# EAGLE board CPC_RAM512K_V1.01 (EAGLE 6.4)
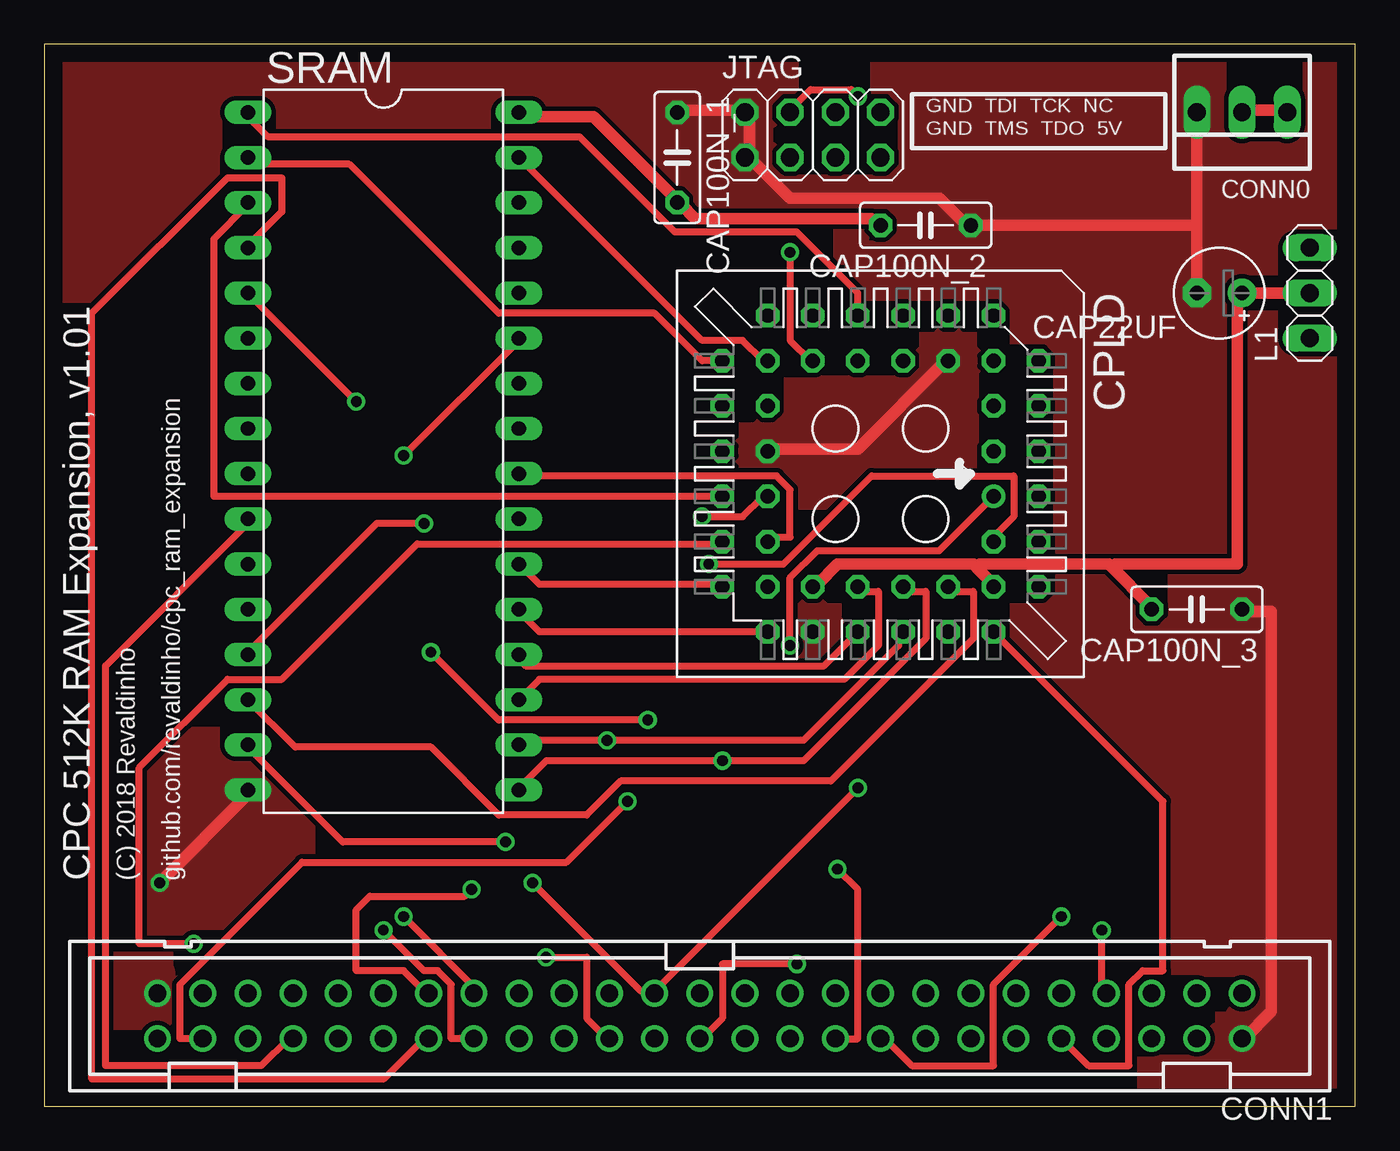
[diagram p0: board, top side]
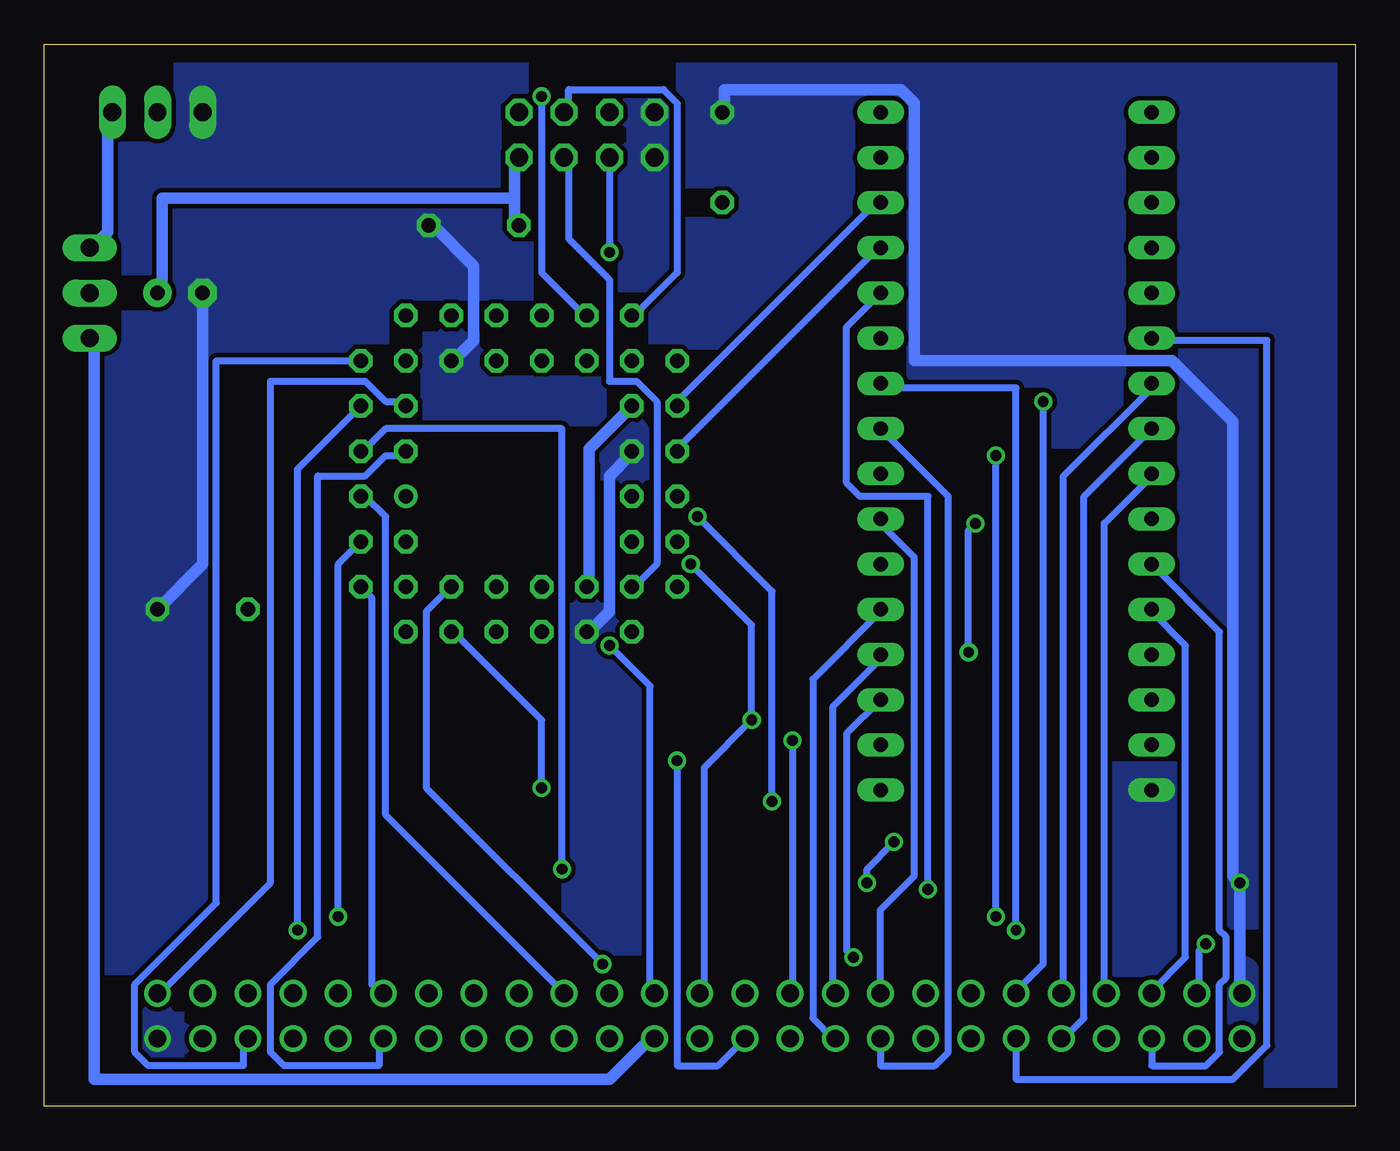
[diagram p1: board, bottom side, seen from below]

Size 73.66 x 59.69 mm. Coordinates in mm from the lower left corner, seen from the top.
Outline: 0,0 73.66,0 73.66,59.69 0,59.69 0,0
Copper layers (1*16): Top 0.035mm / dielectric 1.5mm / Bottom 0.035mm
Design rules "default": minimum track width 10mil, minimum drill 24mil, track to track 8mil, track to pad 8mil, pad to pad 8mil, via to via 8mil, smd to smd 8mil, copper to edge 40mil, drill to drill 8mil, minimum pad ring 10mil, minimum via ring 8mil, stop-mask expansion 4mil, vias tented up to drill 0mil, thermal gap 10mil
Net classes: 0 signal: width 0.381 mm, clearance 0.254 mm; 1 supply: width 0.635 mm, clearance 0.254 mm

## Footprints (pad centres in the part's own frame; a part is rotated, then mirrored left to right if it is on the bottom)
E2,5-5 = drill 0.813 pad 1.6: + -1.27,0 | drill 0.813 pad 1.6 octagon: - 1.27,0
C050-025X075 = drill 0.813 octagon: 1 -2.54,0; 2 2.54,0
22-23-2031 = drill 1 long: 1 -2.54,0; 2 0,0; 3 2.54,0
PAK100/2500-50 = drill 1 pad 1.422: 1 -30.48,-1.27; 2 -30.48,1.27; 3 -27.94,-1.27; 4 -27.94,1.27; 5 -25.4,-1.27; 6 -25.4,1.27; 7 -22.86,-1.27; 8 -22.86,1.27; 9 -20.32,-1.27; 10 -20.32,1.27; 11 -17.78,-1.27; 12 -17.78,1.27; 13 -15.24,-1.27; 14 -15.24,1.27; 15 -12.7,-1.27; 16 -12.7,1.27; 17 -10.16,-1.27; 18 -10.16,1.27; 19 -7.62,-1.27; 20 -7.62,1.27; 21 -5.08,-1.27; 22 -5.08,1.27; 23 -2.54,-1.27; 24 -2.54,1.27; 25 0,-1.27; 26 0,1.27; 27 2.54,-1.27; 28 2.54,1.27; 29 5.08,-1.27; 30 5.08,1.27; 31 7.62,-1.27; 32 7.62,1.27; 33 10.16,-1.27; 34 10.16,1.27; 35 12.7,-1.27; 36 12.7,1.27; 37 15.24,-1.27; 38 15.24,1.27; 39 17.78,-1.27; 40 17.78,1.27; 41 20.32,-1.27; 42 20.32,1.27; 43 22.86,-1.27; 44 22.86,1.27; 45 25.4,-1.27; 46 25.4,1.27; 47 27.94,-1.27; 48 27.94,1.27; 49 30.48,-1.27; 50 30.48,1.27
PLCC-S44-SOCKET = drill 0.813: 1 1.27,6.35 | drill 0.813 octagon: 2 -1.27,8.89; 3 -1.27,6.35; 4 -3.81,8.89; 5 -3.81,6.35; 6 -6.35,8.89; 7 -8.89,6.35; 8 -6.35,6.35; 9 -8.89,3.81; 10 -6.35,3.81; 11 -8.89,1.27; 12 -6.35,1.27; 13 -8.89,-1.27; 14 -6.35,-1.27; 15 -8.89,-3.81; 16 -6.35,-3.81; 17 -8.89,-6.35; 18 -6.35,-8.89; 19 -6.35,-6.35; 20 -3.81,-8.89; 21 -3.81,-6.35; 22 -1.27,-8.89; 23 -1.27,-6.35; 24 1.27,-8.89; 25 1.27,-6.35; 26 3.81,-8.89; 27 3.81,-6.35; 28 6.35,-8.89; 29 8.89,-6.35; 30 6.35,-6.35; 31 8.89,-3.81; 32 6.35,-3.81; 33 8.89,-1.27; 34 6.35,-1.27; 35 8.89,1.27; 36 6.35,1.27; 37 8.89,3.81; 38 6.35,3.81; 39 8.89,6.35; 40 6.35,8.89; 41 6.35,6.35; 42 3.81,8.89; 43 3.81,6.35; 44 1.27,8.89
2X04 = drill 1.016 octagon: 1 -3.81,-1.27; 2 -3.81,1.27; 3 -1.27,-1.27; 4 -1.27,1.27; 5 1.27,-1.27; 6 1.27,1.27; 7 3.81,-1.27; 8 3.81,1.27
1X03 = drill 1.016 long: 1 -2.54,0; 2 0,0; 3 2.54,0
DIL32 = drill 0.813 long: 1 -19.05,-7.62; 2 -16.51,-7.62; 3 -13.97,-7.62; 4 -11.43,-7.62; 5 -8.89,-7.62; 6 -6.35,-7.62; 7 -3.81,-7.62; 8 -1.27,-7.62; 9 1.27,-7.62; 10 3.81,-7.62; 11 6.35,-7.62; 12 8.89,-7.62; 13 11.43,-7.62; 14 13.97,-7.62; 15 16.51,-7.62; 16 19.05,-7.62; 17 19.05,7.62; 18 16.51,7.62; 19 13.97,7.62; 20 11.43,7.62; 21 8.89,7.62; 22 6.35,7.62; 23 3.81,7.62; 24 1.27,7.62; 25 -1.27,7.62; 26 -3.81,7.62; 27 -6.35,7.62; 28 -8.89,7.62; 29 -11.43,7.62; 30 -13.97,7.62; 31 -16.51,7.62; 32 -19.05,7.62

## Placement (x,y rotation side)
CAP22UF  [E2,5-5]  66.04,45.72 180 top
CAP100N_1  [C050-025X075]  35.56,53.34 270 top
CAP100N_2  [C050-025X075]  49.53,49.53 180 top
CAP100N_3  [C050-025X075]  64.77,27.94 180 top
CONN0  [22-23-2031]  67.31,55.88 180 top
CONN1  [PAK100/2500-50]  36.83,5.08 180 top
CPLD  [PLCC-S44-SOCKET]  46.99,35.56 270 top
JTAG  [2X04]  43.18,54.61 0 top
L1  [1X03]  71.12,45.72 90 top
SRAM  [DIL32]  19.05,36.83 270 top

## Library data of the parts
CAP22UF CAP100N_1-CAP100N_3 = resistor
CONN0 = con-molex
CONN1 = con-3m
CPLD SRAM = ic-package
JTAG L1 = pinhead

## Nets
A0: CONN1.33 SRAM.23
A1: CONN1.34 SRAM.25
A2: CONN1.35 SRAM.27
A3: CONN1.36 SRAM.26
A4: CONN1.37 SRAM.28
A5: CONN1.38 SRAM.4
A6: CONN1.39 SRAM.5
A7: CONN1.40 SRAM.6
A8: CONN1.41 SRAM.7
A9: CONN1.42 SRAM.8
A10: CONN1.43 SRAM.9
A11: CONN1.44 SRAM.10
A12: CONN1.45 SRAM.12
A13: CONN1.46 SRAM.11
A14: CONN1.47 CPLD.26
A15: CONN1.48 CPLD.25
BUSACK_B: CONN1.13
BUSRESET_B: CONN1.11 CPLD.40
BUSRQ_B: CONN1.14
CLK: CONN1.1 CPLD.5
CURSOR: CONN1.5
D0: CONN1.25 CPLD.43 SRAM.13
D1: CONN1.26 CPLD.38 SRAM.14
D2: CONN1.27 CPLD.37 SRAM.15
D3: CONN1.28 CPLD.36 SRAM.17
D4: CONN1.29 CPLD.35 SRAM.18
D5: CONN1.30 CPLD.34 SRAM.19
D6: CONN1.31 CPLD.33 SRAM.20
D7: CONN1.32 CPLD.29 SRAM.21
EXP_B: CONN1.3
HALT_B: CONN1.17
HIADR0: CPLD.24 SRAM.3
HIADR1: CPLD.19 SRAM.31
HIADR2: CPLD.18 SRAM.2
HIADR3: CPLD.20 SRAM.30
HIADR4: CPLD.13 SRAM.1
INT_B: CONN1.16
IOREQ_B: CONN1.20 CPLD.2
LPEN: CONN1.4
M1_B: CONN1.22
MREQ_B: CONN1.23 CPLD.1
NMI_B: CONN1.15
RAMCS_B: CPLD.28 SRAM.22
RAMDIS: CONN1.6 CPLD.6
RAMOE_B: CPLD.27 SRAM.24
RAMRD_B: CONN1.7 CPLD.4
RAMWE_B: CPLD.22 SRAM.29
RD_B: CONN1.19 CPLD.44
READY: CONN1.12 CPLD.3
RESET_B: CONN1.10 CPLD.39
RFSH_B: CONN1.21
ROMDIS: CONN1.8
ROMEN_B: CONN1.9
SOUND: CONN1.50
TCK: CPLD.17 JTAG.6
TDI: CPLD.15 JTAG.4
TDO: CPLD.30 JTAG.5
TMS: CPLD.16 JTAG.3
VDD [supply]: CAP22UF.+ CAP100N_1.2 CAP100N_2.2 CAP100N_3.2 CPLD.21 CPLD.32 CPLD.41 JTAG.7 L1.2 SRAM.32
VDD_CPC [supply]: CONN1.24 L1.1
VDD_EXT [supply]: CONN0.1 CONN0.2 L1.3
VSS [supply]: CAP22UF.- CAP100N_1.1 CAP100N_2.1 CAP100N_3.1 CONN0.3 CONN1.2 CONN1.49 CPLD.10 CPLD.23 CPLD.31 JTAG.1 JTAG.2 SRAM.16
WR_B: CONN1.18 CPLD.42

## Tracks (layer width: path | path; a pad name or v marks a point on that pad's centre or on a via)
A0
  Bottom 0.381: CONN1.33 26.67,11.05 24.77,12.95 24.77,30.86 26.67,32.77 SRAM.23
A1
  Bottom 0.381: SRAM.25 22.86,34.29 22.86,3.05 23.62,2.29 26.67,2.29 CONN1.34
A2  (via drill 0.61)
  Top 0.381: v20.19,36.58 26.67,43.05 SRAM.27 | v20.19,10.67 24.38,6.48 CONN1.35
  Bottom 0.381: v20.19,10.67 v20.19,36.58
A3  (via drill 0.61)
  Top 0.381: v19.05,9.91 21.34,7.62 22.1,7.62 22.86,6.86 22.86,3.81 CONN1.36
  Bottom 0.381: v19.05,9.91 19.05,40.39 26.67,40.39 SRAM.26
A4  (via drill 0.61)
  Top 0.381: v24,12.19 23.62,11.81 18.29,11.81 17.53,11.05 17.53,7.62 20.19,7.62 21.34,6.48 CONN1.37
  Bottom 0.381: SRAM.28 28.57,43.81 28.57,35.05 27.81,34.29 24,34.29 v24,12.19
A5
  Top 0.381: SRAM.4 11.43,48.39 13.34,50.29 13.34,52.2 10.29,52.2 2.67,44.58 2.67,1.52 19.05,1.52 21.34,3.81 CONN1.38
A6  (via drill 0.61)
  Top 0.381: v17.53,39.62 SRAM.5
  Bottom 0.381: v17.53,39.62 17.53,8 19.05,6.48 CONN1.39
A7
  Bottom 0.381: CONN1.40 19.05,1.52 6.86,1.52 4.95,3.43 4.95,43.05 11.43,43.05 SRAM.6
A8
  Bottom 0.381: SRAM.7 11.43,40.39 16.38,35.43 16.38,6.48 CONN1.41
A9
  Bottom 0.381: SRAM.8 15.24,34.29 15.24,4.95 16.38,3.81 CONN1.42
A10
  Bottom 0.381: SRAM.9 11.43,35.43 14.1,32.77 14.1,6.48 CONN1.43
A11
  Top 0.381: SRAM.10 11.43,32.77 3.43,24.77 3.43,2.29 12.19,2.29 13.72,3.81 CONN1.44
A12
  Bottom 0.381: SRAM.12 11.43,27.81 9.53,25.91 9.53,8.38 11.43,6.48 CONN1.45
A13
  Bottom 0.381: SRAM.11 7.62,26.67 7.62,9.91 7.24,9.53 7.24,7.24 7.62,6.86 7.62,3.05 8.38,2.29 11.43,2.29 CONN1.46
A14  (via drill 0.61)
  Top 0.381: v8.38,9.14 5.33,9.14 5.33,19.05 10.29,24 13.34,24 20.95,31.62 38.1,31.62 CPLD.26
  Bottom 0.381: v8.38,9.14 8.76,8.76 8.76,6.48 CONN1.47
A15  (via drill 0.61)
  Top 0.381: v36.96,33.15 39.24,33.15 40.39,34.29 CPLD.25 | v32.77,17.14 29.34,13.72 14.48,13.72 7.62,6.86 7.62,3.81 CONN1.48
  Bottom 0.381: v36.96,33.15 32.77,28.96 v32.77,17.14
BUSRESET_B
  Bottom 0.381: CPLD.40 55.24,28.57 55.24,6.86 54.86,6.48 CONN1.11
CLK
  Bottom 0.381: CPLD.5 53.34,39.62 54.48,39.62 55.63,40.77 60.96,40.77 60.96,12.57 67.06,6.48 CONN1.1
D0  (via drill 0.61)
  Top 0.381: v21.34,32.77 18.67,32.77 11.43,25.53 SRAM.13 | v21.72,25.53 25.53,21.72 v33.91,21.72 | v37.34,30.48 41.53,30.48 46.48,35.43 54.48,35.43 54.48,33.15 53.34,32 CPLD.43
  Bottom 0.381: v21.34,32.77 21.72,32.38 v21.72,25.53 | CONN1.25 36.58,6.48 36.58,19.05 v33.91,21.72 33.91,27.05 v37.34,30.48
D1  (via drill 0.61)
  Top 0.381: SRAM.14 14.1,20.19 21.72,20.19 25.53,16.38 30.48,16.38 32.38,18.29 44.2,18.29 52.2,26.29 52.2,28.96 51.05,28.96 CPLD.38 | v42.29,8 38.1,8 38.1,4.95 36.96,3.81 CONN1.26
  Bottom 0.381: v42.29,8 52.2,17.91 52.2,27.81 CPLD.38
D2  (via drill 0.61)
  Top 0.381: v25.91,14.86 16.76,14.86 11.43,20.19 SRAM.15 | v27.43,12.57 33.53,6.48 34.29,6.48 | 34.29,6.48 v45.72,17.91 | 34.29,6.48 CONN1.27
  Bottom 0.381: v25.91,14.86 27.43,13.34 v27.43,12.57 | v45.72,17.91 45.72,21.72 50.67,26.67 CPLD.37
D3  (via drill 0.61)
  Top 0.381: SRAM.17 26.67,17.91 28.19,19.43 v38.1,19.43 42.67,19.43 49.53,26.29 49.53,28.96 48.39,28.96 CPLD.36
  Bottom 0.381: CONN1.28 35.81,2.29 38.1,2.29 v38.1,19.43
D4  (via drill 0.61)
  Top 0.381: SRAM.18 26.67,20.57 v31.62,20.57 42.67,20.57 48.01,25.91 48.01,26.67 CPLD.35
  Bottom 0.381: v31.62,20.57 31.62,6.48 CONN1.29
D5  (via drill 0.61)
  Top 0.381: SRAM.19 27.81,24 44.96,24 46.86,25.91 46.86,28.96 45.72,28.96 CPLD.34 | v28.19,8.38 30.48,8.38 30.48,4.95 31.62,3.81 CONN1.30
  Bottom 0.381: v28.19,8.38 28.57,8.76 28.57,20.95 SRAM.19
D6
  Top 0.381: CPLD.33 43.81,24.77 27.05,24.77 26.67,25.15 SRAM.20
  Bottom 0.381: SRAM.20 26.67,25.15 29.34,22.48 29.34,6.48 CONN1.31
D7
  Top 0.381: CPLD.29 27.81,26.67 26.67,27.81 SRAM.21
  Bottom 0.381: CONN1.32 29.34,3.81 30.48,4.95 30.48,24 26.67,27.81 SRAM.21
HIADR0
  Top 0.381: CPLD.24 9.53,34.29 9.53,48.77 11.43,50.67 SRAM.3
HIADR1
  Top 0.381: SRAM.31 36.96,43.05 39.24,43.05 40.39,41.91 CPLD.19
HIADR2
  Top 0.381: SRAM.2 11.81,52.96 17.14,52.96 25.53,44.58 34.29,44.58 36.96,41.91 CPLD.18
HIADR3
  Bottom 0.381: CPLD.20 38.1,39.62 26.67,51.05 SRAM.30
HIADR4
  Top 0.381: CPLD.13 45.72,45.72 42.29,49.15 35.43,49.15 30.1,54.48 12.57,54.48 11.43,55.63 SRAM.1
IOREQ_B  (via drill 0.61)
  Top 0.381: v44.58,13.34 45.72,12.19 45.72,3.81 CONN1.20
  Bottom 0.381: v44.58,13.34 44.58,38.1 54.48,38.1 55.63,36.96 CPLD.2
MREQ_B  (via drill 0.61)
  Top 0.381: CPLD.1 50.29,31.24 43.43,31.24 41.91,29.72 v41.91,25.91
  Bottom 0.381: v41.91,25.91 39.62,23.62 39.62,6.48 CONN1.23
RAMCS_B
  Top 0.381: SRAM.22 27.81,29.34 38.1,29.34 CPLD.28
RAMDIS
  Bottom 0.381: CPLD.6 64.01,41.91 64.01,11.43 68.58,6.86 68.58,3.05 67.82,2.29 62.48,2.29 62.48,3.81 CONN1.6
RAMOE_B
  Top 0.381: SRAM.24 26.67,35.43 41.15,35.43 41.91,34.67 41.91,32 40.77,32 CPLD.27
RAMRD_B  (via drill 0.61)
  Top 0.381: v59.44,9.91 59.44,6.48 CONN1.7
  Bottom 0.381: CPLD.4 59.44,35.81 v59.44,9.91
RAMWE_B
  Bottom 0.381: CPLD.22 38.1,36.96 26.67,48.39 SRAM.29
RD_B
  Bottom 0.381: CONN1.19 54.48,16.38 54.48,33.15 55.63,34.29 CPLD.44
READY
  Bottom 0.381: CPLD.3 53.34,36.58 54.48,36.58 55.63,35.43 58.29,35.43 58.29,9.53 60.96,6.86 60.96,3.05 60.2,2.29 54.86,2.29 54.86,3.81 CONN1.12
RESET_B
  Top 0.381: CPLD.39 62.87,17.14 62.87,7.62 61.72,7.62 60.96,6.86 60.96,2.29 58.67,2.29 CONN1.10
TCK
  Bottom 0.381: CPLD.17 40.39,44.58 38.1,46.86 38.1,56.39 38.86,57.15 44.2,57.15 44.2,56.01 JTAG.6
TDI  (via drill 0.61)
  Top 0.381: v45.72,56.77 45.34,57.15 43.05,57.15 41.91,56.01 JTAG.4
  Bottom 0.381: v45.72,56.77 45.72,46.86 43.43,44.58 CPLD.15
TDO
  Bottom 0.381: CPLD.30 40.39,29.34 39.24,30.48 39.24,39.62 40.39,40.77 41.91,40.77 41.91,46.48 44.2,48.77 44.2,53.34 JTAG.5
TMS  (via drill 0.61)
  Top 0.381: v41.91,48.01 41.91,43.05 43.05,41.91 CPLD.16
  Bottom 0.381: JTAG.3 v41.91,48.01
VDD
  Top 0.635: SRAM.32 26.67,55.63 30.86,55.63 35.43,51.05 CAP100N_1.2 35.81,50.67 36.58,49.91 46.48,49.91 46.86,49.53 CAP100N_2.2 | L1.2 CAP22UF.+ 67.06,45.72 67.06,30.48 60.2,30.48 60.01,30.29 | 52.39,30.29 53.34,29.34 CPLD.41 | 52.39,30.29 52.2,30.48 44.58,30.48 43.43,29.34 CPLD.32 | 60.01,30.29 59.82,30.48 52.58,30.48 52.39,30.29 | 60.01,30.29 62.1,28.19 CAP100N_3.2
  Bottom 0.635: 47.24,51.05 47.24,53.34 JTAG.7 | 47.24,51.05 47.24,49.53 CAP100N_2.2 | CPLD.21 43.05,36.96 43.05,29.34 CPLD.32 | 47.24,51.05 67.06,51.05 67.06,45.72 CAP22UF.+
VDD_CPC
  Bottom 0.635: CONN1.24 39.62,3.81 41.91,1.52 70.87,1.52 70.87,43.05 L1.1
VDD_EXT
  Top 0.635: CONN0.2 67.44,56.01 69.72,56.01 CONN0.1
  Bottom 0.635: L1.3 70.87,48.39 70.1,49.15 70.1,55.63 CONN0.1
VSS  (via drill 0.61)
  Top 0.635: CONN1.2 67.44,3.81 68.96,5.33 68.96,27.81 67.44,27.81 CAP100N_3.1 | CAP22UF.- 64.77,49.53 | 64.77,49.53 CONN0.3 | v6.48,12.57 11.43,17.53 SRAM.16 | CAP100N_1.1 35.81,56.01 39.24,56.01 JTAG.2 39.62,55.63 39.62,53.34 | CPLD.10 50.67,41.91 45.72,36.96 40.77,36.96 CPLD.23 | 39.62,53.34 41.91,51.05 50.29,51.05 51.82,49.53 CAP100N_2.1 64.77,49.53 | 39.62,53.34 JTAG.1
  Bottom 0.635: CAP100N_3.1 64.77,30.48 CAP22UF.- | CONN1.49 6.48,6.48 v6.48,12.57 6.86,12.95 6.86,38.48 10.29,41.91 24.77,41.91 24.77,56.39 25.53,57.15 35.43,57.15 35.43,56.01 CAP100N_1.1 | CPLD.31 43.05,26.67 41.91,27.81 41.91,35.43 40.77,36.58 CPLD.23 | CAP100N_2.1 51.82,49.53 49.53,47.24 49.53,43.05 50.67,41.91 CPLD.10
  pour Top: 0,0 0,59.69 74.93,59.69 74.93,0
  pour Bottom: 0,0 0,59.69 74.93,59.69 74.93,0
WR_B  (via drill 0.61)
  Top 0.381: v57.15,10.67 53.34,6.86 53.34,2.29 48.77,2.29 47.24,3.81 CONN1.18
  Bottom 0.381: CPLD.42 57.15,30.48 v57.15,10.67

## Text on the board
tPlace: GND TDI TCK NC | GND TMS TDO 5V | CPC 512K RAM Expansion, v1.01 | (C) 2018 Revaldinho | github.com/revaldinho/cpc_ram_expansion